# EAGLE board 8x8_3mm_1.6x1.6_dual_headers_charlieplexed (EAGLE 6.0)
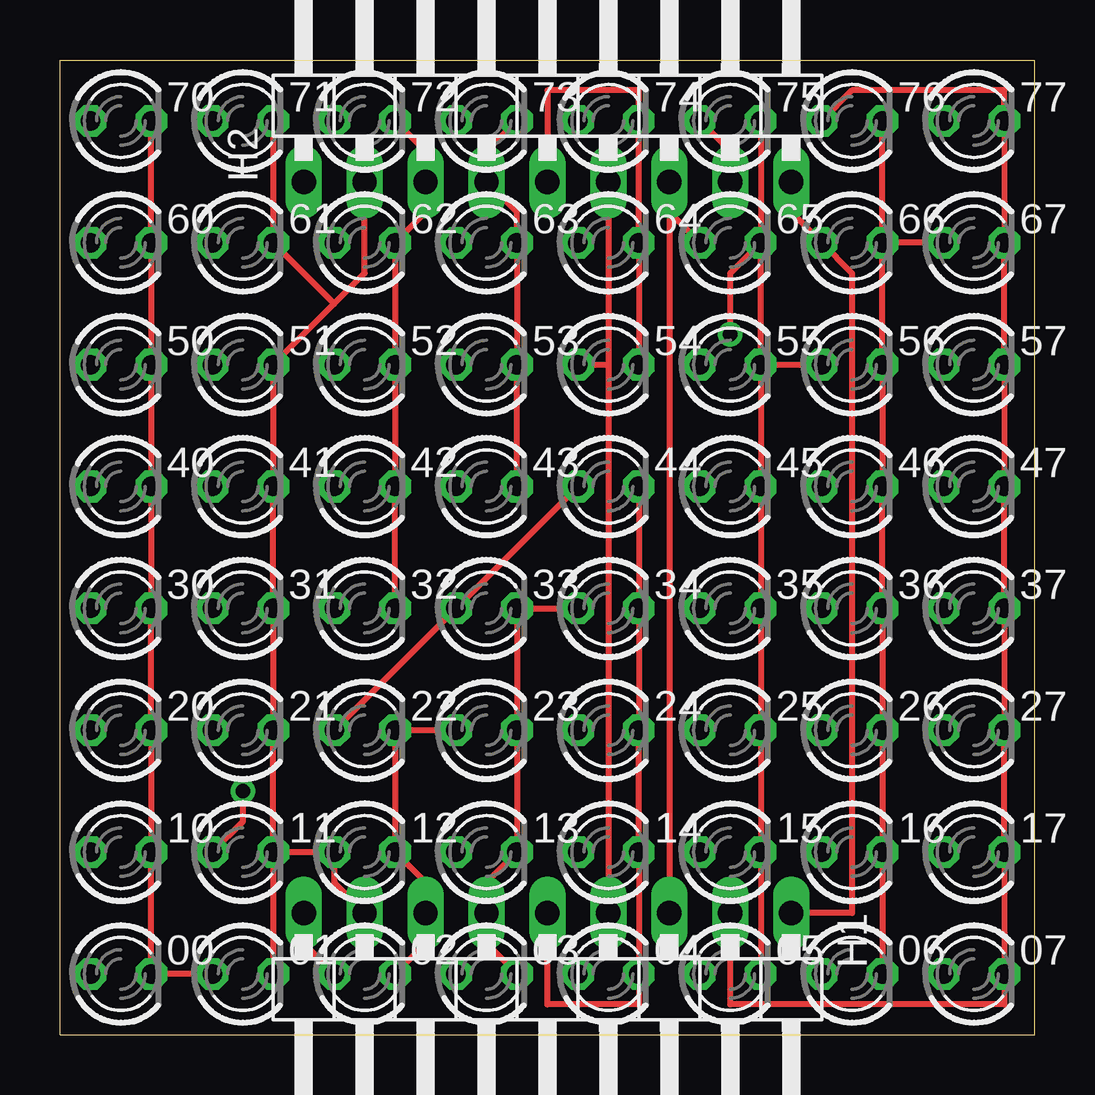
[diagram p0: board, top side]
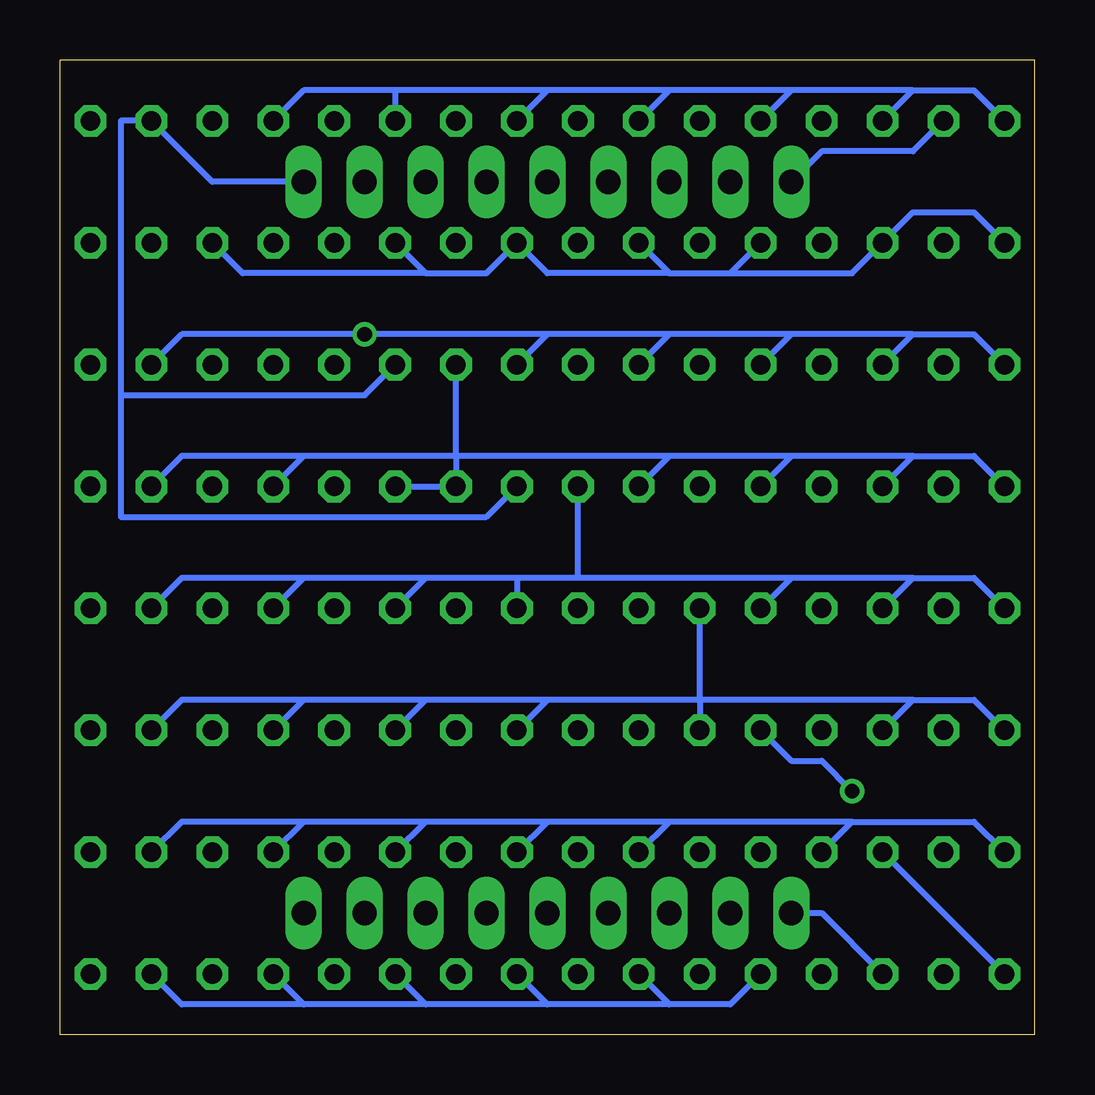
[diagram p1: board, bottom side, seen from below]

Size 40.64 x 40.64 mm. Coordinates in mm from the lower left corner, seen from the top.
Outline: 0,0 0,40.64 40.64,40.64 40.64,0 0,0
Copper layers (1*16): Top 0.035mm / dielectric 1.5mm / Bottom 0.035mm
Design rules: minimum track width 10mil, minimum drill 24mil, track to track 8mil, track to pad 8mil, pad to pad 8mil, via to via 8mil, smd to smd 8mil, copper to edge 40mil, drill to drill 8mil, minimum pad ring 10mil, minimum via ring 8mil, stop-mask expansion 4mil, vias tented up to drill 0mil, thermal gap 10mil

## Footprints (pad centres in the part's own frame; a part is rotated, then mirrored left to right if it is on the bottom)
LED3MM = drill 0.813 octagon: A -1.27,0; K 1.27,0
1X09/90 = drill 1.016 long: 1 -10.16,-3.81; 2 -7.62,-3.81; 3 -5.08,-3.81; 4 -2.54,-3.81; 5 0,-3.81; 6 2.54,-3.81; 7 5.08,-3.81; 8 7.62,-3.81; 9 10.16,-3.81

## Placement (x,y rotation side)
00  [LED3MM]  2.54,2.54 0 top
01  [LED3MM]  7.62,2.54 0 top
02  [LED3MM]  12.7,2.54 0 top
03  [LED3MM]  17.78,2.54 0 top
04  [LED3MM]  22.86,2.54 0 top
05  [LED3MM]  27.94,2.54 0 top
06  [LED3MM]  33.02,2.54 0 top
07  [LED3MM]  38.1,2.54 0 top
10  [LED3MM]  2.54,7.62 0 top
11  [LED3MM]  7.62,7.62 0 top
12  [LED3MM]  12.7,7.62 0 top
13  [LED3MM]  17.78,7.62 0 top
14  [LED3MM]  22.86,7.62 0 top
15  [LED3MM]  27.94,7.62 0 top
16  [LED3MM]  33.02,7.62 0 top
17  [LED3MM]  38.1,7.62 0 top
20  [LED3MM]  2.54,12.7 0 top
21  [LED3MM]  7.62,12.7 0 top
22  [LED3MM]  12.7,12.7 0 top
23  [LED3MM]  17.78,12.7 0 top
24  [LED3MM]  22.86,12.7 0 top
25  [LED3MM]  27.94,12.7 0 top
26  [LED3MM]  33.02,12.7 0 top
27  [LED3MM]  38.1,12.7 0 top
30  [LED3MM]  2.54,17.78 0 top
31  [LED3MM]  7.62,17.78 0 top
32  [LED3MM]  12.7,17.78 0 top
33  [LED3MM]  17.78,17.78 0 top
34  [LED3MM]  22.86,17.78 0 top
35  [LED3MM]  27.94,17.78 0 top
36  [LED3MM]  33.02,17.78 0 top
37  [LED3MM]  38.1,17.78 0 top
40  [LED3MM]  2.54,22.86 0 top
41  [LED3MM]  7.62,22.86 0 top
42  [LED3MM]  12.7,22.86 0 top
43  [LED3MM]  17.78,22.86 0 top
44  [LED3MM]  22.86,22.86 0 top
45  [LED3MM]  27.94,22.86 0 top
46  [LED3MM]  33.02,22.86 0 top
47  [LED3MM]  38.1,22.86 0 top
50  [LED3MM]  2.54,27.94 0 top
51  [LED3MM]  7.62,27.94 0 top
52  [LED3MM]  12.7,27.94 0 top
53  [LED3MM]  17.78,27.94 0 top
54  [LED3MM]  22.86,27.94 0 top
55  [LED3MM]  27.94,27.94 0 top
56  [LED3MM]  33.02,27.94 0 top
57  [LED3MM]  38.1,27.94 0 top
60  [LED3MM]  2.54,33.02 0 top
61  [LED3MM]  7.62,33.02 0 top
62  [LED3MM]  12.7,33.02 0 top
63  [LED3MM]  17.78,33.02 0 top
64  [LED3MM]  22.86,33.02 0 top
65  [LED3MM]  27.94,33.02 0 top
66  [LED3MM]  33.02,33.02 0 top
67  [LED3MM]  38.1,33.02 0 top
70  [LED3MM]  2.54,38.1 0 top
71  [LED3MM]  7.62,38.1 0 top
72  [LED3MM]  12.7,38.1 0 top
73  [LED3MM]  17.78,38.1 0 top
74  [LED3MM]  22.86,38.1 0 top
75  [LED3MM]  27.94,38.1 0 top
76  [LED3MM]  33.02,38.1 0 top
77  [LED3MM]  38.1,38.1 0 top
H1  [1X09/90]  20.32,1.27 180 top
H2  [1X09/90]  20.32,39.37 0 top

## Library data of the parts
00 01-07 10-17 20-27 30-37 40-47 50-57 60-67 70-77 = led
H1 H2 = pinhead

## Nets
D: 00.A 11.A 22.A 33.A 44.A 55.A 66.A 77.A H1.1 H2.9
S0: 00.K 01.A 02.A 03.A 04.A 05.A 06.A 07.A 10.K 20.K 30.K 40.K 50.K 60.K 70.K H1.9 H2.1
S1: 01.K 10.A 11.K 12.A 13.A 14.A 15.A 16.A 17.A 21.K 31.K 41.K 51.K 61.K 71.K H1.8 H2.2
S2: 02.K 12.K 20.A 21.A 22.K 23.A 24.A 25.A 26.A 27.A 32.K 42.K 52.K 62.K 72.K H1.7 H2.3
S3: 03.K 13.K 23.K 30.A 31.A 32.A 33.K 34.A 35.A 36.A 37.A 43.K 53.K 63.K 73.K H1.6 H2.4
S4: 04.K 14.K 24.K 34.K 40.A 41.A 42.A 43.A 44.K 45.A 46.A 47.A 54.K 64.K 74.K H1.5 H2.5
S5: 05.K 15.K 25.K 35.K 45.K 50.A 51.A 52.A 53.A 54.A 55.K 56.A 57.A 65.K 75.K H1.4 H2.6
S6: 06.K 16.K 26.K 36.K 46.K 56.K 60.A 61.A 62.A 63.A 64.A 65.A 66.K 67.A 76.K H1.3 H2.7
S7: 07.K 17.K 27.K 37.K 47.K 57.K 67.K 70.A 71.A 72.A 73.A 74.A 75.A 76.A 77.K H1.2 H2.8

## Tracks (layer width: path | path; a pad name or v marks a point on that pad's centre or on a via)
D  (via drill 0.61)
  Top 0.254: 22.A 33.A 44.A | 11.A 7.62,8.89 v7.62,10.16 | H2.9 30.48,34.29 66.A 33.02,31.75 33.02,5.08 H1.1
  Bottom 0.254: 11.A 00.A | v7.62,10.16 8.89,11.43 10.16,11.43 22.A | 55.A 27.94,26.67 38.1,26.67 | 38.1,26.67 38.1,38.1 77.A 34.29,35.56 H2.9 | 44.A 22.86,21.59 38.1,21.59 38.1,26.67
S0
  Top 0.254: 70.K 60.K 50.K 40.K 30.K 20.K 10.K 00.K 01.A | 02.A 10.16,3.81 H1.9
  Bottom 0.254: H2.1 8.89,36.83 5.08,36.83 70.K | 15.24,1.27 03.A | 15.24,1.27 12.7,1.27 02.A | 20.32,1.27 04.A | 15.24,1.27 20.32,1.27 | 25.4,1.27 05.A | 20.32,1.27 25.4,1.27 | 30.48,1.27 06.A | 25.4,1.27 30.48,1.27 | 07.A 35.56,1.27 30.48,1.27 | 01.A 8.89,5.08 H1.9
S1
  Top 0.254: 71.K 61.K 11.43,30.48 | H2.2 12.7,31.75 11.43,30.48 | 11.43,30.48 51.K 41.K 31.K 21.K 11.K | 11.K 01.K | 11.K 12.A 11.43,6.35 H1.8
  Bottom 0.254: 10.A 2.54,8.89 7.62,8.89 | 11.K 7.62,8.89 | 15.24,8.89 13.A | 7.62,8.89 15.24,8.89 | 20.32,8.89 14.A | 15.24,8.89 20.32,8.89 | 25.4,8.89 15.A | 20.32,8.89 25.4,8.89 | 30.48,8.89 16.A | 25.4,8.89 30.48,8.89 | 17.A 35.56,8.89 30.48,8.89
S2
  Top 0.254: 72.K 15.24,36.83 H2.3 15.24,34.29 62.K 52.K 42.K 32.K | 02.K 15.24,3.81 H1.7 15.24,6.35 12.K 22.K 23.A
  Bottom 0.254: 20.A 2.54,13.97 5.08,13.97 | 21.A 5.08,13.97 | 20.32,13.97 24.A | 5.08,13.97 13.97,13.97 | 13.97,13.97 20.32,13.97 | 25.4,13.97 25.A | 20.32,13.97 25.4,13.97 | 30.48,13.97 26.A | 25.4,13.97 30.48,13.97 | 27.A 35.56,13.97 30.48,13.97 | 13.97,13.97 32.K | 13.97,13.97 22.K
S3
  Top 0.254: 03.K 17.78,3.81 H1.6 17.78,6.35 13.K 23.K 33.K 34.A | 73.K 17.78,36.83 H2.4 19.05,34.29 63.K 53.K 43.K
  Bottom 0.254: 30.A 2.54,19.05 5.08,19.05 | 31.A 5.08,19.05 | 10.16,19.05 32.A | 5.08,19.05 10.16,19.05 | 25.4,19.05 35.A | 10.16,19.05 19.05,19.05 | 19.05,19.05 21.59,19.05 | 21.59,19.05 25.4,19.05 | 30.48,19.05 36.A | 25.4,19.05 30.48,19.05 | 37.A 35.56,19.05 30.48,19.05 | 19.05,19.05 43.K | 21.59,19.05 34.A
S4
  Top 0.254: H1.5 20.32,1.27 24.13,1.27 04.K 14.K 24.K 34.K 44.K | 54.K 64.K 74.K 24.13,39.37 20.32,39.37 H2.5
  Bottom 0.254: 45.A 44.K 24.13,24.13 | 40.A 2.54,24.13 5.08,24.13 | 41.A 5.08,24.13 | 10.16,24.13 42.A | 5.08,24.13 10.16,24.13 | 15.24,24.13 43.A | 10.16,24.13 15.24,24.13 | 30.48,24.13 46.A | 15.24,24.13 24.13,24.13 | 24.13,24.13 30.48,24.13 | 47.A 35.56,24.13 30.48,24.13 | 24.13,24.13 54.K
S5  (via drill 0.61)
  Top 0.254: 05.K 15.K 25.K 35.K 45.K 55.K | 75.K 65.K | 55.K 56.A | 55.K 65.K | H2.6 22.86,27.94 | 22.86,27.94 H1.4 | 54.A 22.86,27.94 | 65.K 27.94,31.75 v27.94,29.21
  Bottom 0.254: 50.A 2.54,29.21 5.08,29.21 | 51.A 5.08,29.21 | 10.16,29.21 52.A | 5.08,29.21 10.16,29.21 | 15.24,29.21 53.A | 10.16,29.21 15.24,29.21 | 20.32,29.21 54.A | 15.24,29.21 20.32,29.21 | 57.A 35.56,29.21 v27.94,29.21 20.32,29.21
S6
  Top 0.254: 67.A 66.K | 66.K 76.K | 06.K 16.K 26.K 36.K 46.K 56.K 66.K | 25.4,34.29 65.A | 25.4,34.29 H1.3 | 25.4,34.29 H2.7
  Bottom 0.254: 60.A 2.54,34.29 5.08,34.29 61.A 7.62,31.75 12.7,31.75 | 12.7,31.75 62.A | 15.24,31.75 12.7,31.75 | 63.A 15.24,31.75 | 15.24,31.75 20.32,31.75 64.A 22.86,31.75 25.4,31.75 | 65.A 25.4,31.75 | 66.K 33.02,31.75 25.4,31.75
S7
  Top 0.254: 75.A 27.94,36.83 H2.8 | H1.2 27.94,1.27 39.37,1.27 07.K 17.K 27.K 37.K 47.K 57.K 67.K 77.K 39.37,39.37 33.02,39.37 76.A
  Bottom 0.254: 70.A 2.54,39.37 5.08,39.37 | 71.A 5.08,39.37 | 10.16,39.37 72.A | 5.08,39.37 10.16,39.37 | 15.24,39.37 73.A | 10.16,39.37 15.24,39.37 | 20.32,39.37 74.A | 15.24,39.37 20.32,39.37 | 76.A 30.48,39.37 26.67,39.37 | 20.32,39.37 26.67,39.37 | 26.67,39.37 75.A